# Altium PCB LbElectric.PcbDoc (part 2 of 2)
Units mil, origin at the board's own origin, x right, y up, seen from the top; angles counter-clockwise.
Board outline 7067.96 x 2323.86 mil, 2 copper layers (Top Layer, Bottom Layer), stack 12.8 mil thick; 133 components, 113 nets, 507 pads, 49 vias.
Unrouted connection lines stored in the file: 3.
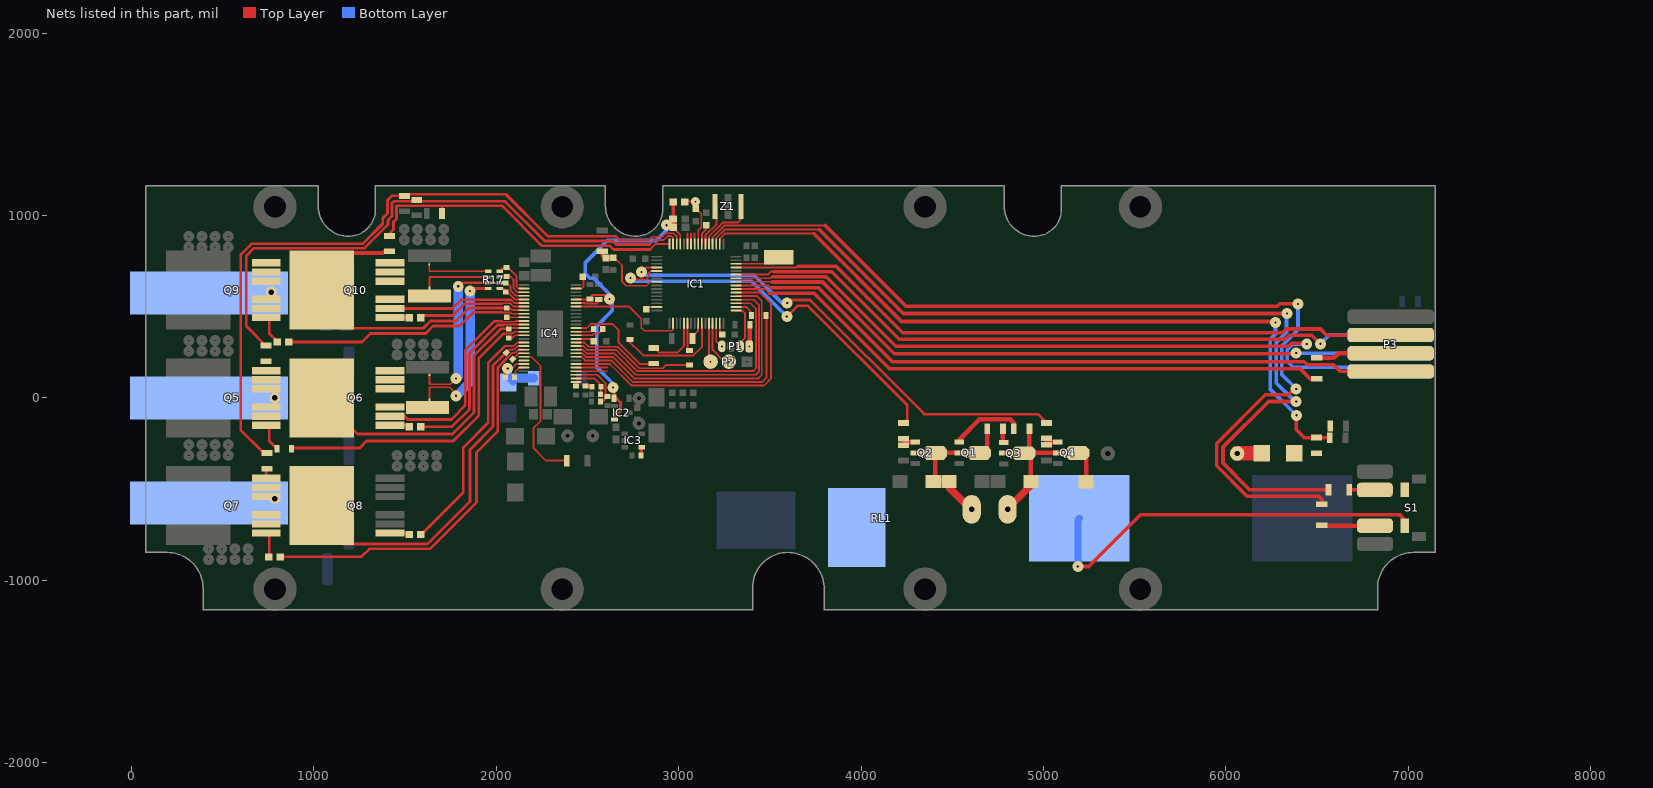
[diagram p2: the nets of this part, all layers, seen from the top]

## Via types
v1: diameter 60, hole 11.81, Top Layer to Bottom Layer, 47 vias
v2: diameter 60, hole 28, Top Layer to Bottom Layer, 2 vias

## Nets (pads, with @x,y where several pads share a name; then routed paths per layer and width w, separated by ;. In a path a pad name is that pad's centre, name@x,y a point inside that pad or via, vN(x,y) a via of type N, cw(c..) or ccw(c..) an arc to the next point about the centre after c; other vN are vias at no path point) (continued)
_REF: C1.1 C3.1 C17.1 C27.1 IC1.13 IC2.2 IC4.24 R12.1 | length 2134.4
  Top Layer w8: C27.1@2513.43,540.43 C27.1@2515,542
  Top Layer w10: IC4.24@2437.66,540.43 C27.1@2513.43,540.43 ; C27.1@2514,542 2514,552 2527,565 2594,565 v1@2621,538 ; v1@2947.54,959 C3.1@2969.54,981 ; C1.1@2968.77,934.23 3009.08,893.92 IC1.13@3009.08,844.54 ; C1.1@2970.54,936 2970.54,938.46 C3.1@2970.54,983.54
  Top Layer w15: v1(2640,58) 2649,58 2649,-2 2659,-2 2681,-24 2681,-71 2649,-103 IC2.2@2649,-117
  Top Layer w20: C1.1@2970.5,938.5 R12.1@2970.5,1075 ; C1.1@2970.54,938.46 C1.1@2974,935
  Bottom Layer w20: v1@2639,56 2639,80 2552,167 2552,395 2636,479 2636,528 v1(2621,543) 2621,569 2533,657 2513,657 2489,681 2489,743 2609,863 2877,863 2934,920 v1(2934,947) v1@2937,950
AN_IN: C10.1 IC1.24 R10.2 R11.1 | length 452.8
  Top Layer w10: C10.1@2643,769 2647,769 2690,726 2690,638 2713,615 2824,615 2845.86,636.86 IC1.24@2880.14,636.86
  Top Layer w20: R10.2@2581,803.91 2581,780 2593,768 2594,769 C10.1@2643,769
CE: IC1.61 P3.3 | length 3632.5
  Top Layer w10: IC1.61@3315.18,715.6 3650.6,715.6 3657,722
  Top Layer w20: 3657,722 3863,722 4228,357 6310,357 6331,378 6518,378 6553,343 6765,343 P3.3@6769,347
CS: IC1.59 P3.4 | length 3797.7
  Top Layer w10: IC1.59@3315.18,676.23 3488.23,676.23 3505,693 3523,693
  Top Layer w20: 3522,692 3839,692 4209,322 6325,322 6347,344 6471,344 v1(6518,297)
  Bottom Layer w20: v1(6518,297) 6566.28,345.28 P3.4@6903.07,345.28
DC_CAL: IC4.12 R7.2 | length 687.3
  Top Layer w10: IC4.12@2437.66,304.21 2483.79,304.21 2507,281 2667,281 2785,163 2913,163 2931,181 R7.2@3059,181
DM: IC1.44 P2.3 | length 215.1
  Top Layer w10: IC1.44@3166.56,409.5 3166.56,213.44 P2.3@3180,200
DP: IC1.45 P2.2 | length 270.3
  Top Layer w10: IC1.45@3186.24,409.5 3186.24,263.76 3251,199 P2.2@3275,199 P2.2@3284,199
EN_GATE: IC4.16 R6.2 | length 578.6
  Top Layer w10: IC4.16@2437.66,382.95 2494.95,382.95 2517,405 2639,405 2670,374 2670,305 2788,187 2875,187 R6.2@2874,188
FAULT: IC1.54 IC4.6 | length 1761.8
  Top Layer w10: IC4.6@2437.66,186.1 2623.9,186.1 2742,68 3468,68 3506,106 3506,520 3448.2,577.8 IC1.54@3315.18,577.8
IRQ: IC1.58 P3.8 | length 3961.4
  Top Layer w10: IC1.58@3315.18,656.54 3503.54,656.54 3514,667
  Top Layer w20: 3516,664 3809,664 4190,283 6342,283 6358,299 6439,299 v1(6443,295)
  Bottom Layer w20: v1(6443,295) 6366,295 6336,265 6336,202 6369,169 6781,169 P3.8@6798,152
LED_1: IC1.4 R8.1 | length 5358.1
  Top Layer w10: IC1.4@3186.24,844.54 3186.24,880.24 3251,945 3804,945
  Top Layer w20: 3804,945 4246,503 6282,503 6295,516 v1(6395,516) ; v1(6385,50) 6374,50 6341,17 6216,17 5949,-250 5949,-371 6116,-538 6510,-538 6527.91,-555.91 R8.1@6527.91,-581.91
  Bottom Layer w20: v1(6385,50) 6306,129 6306,285 6395,374 v1(6395,516)
LED_2: IC1.3 R9.1 | length 5164.7
  Top Layer w10: IC1.3@3205.93,844.54 3205.93,876.93 3252,923 3771,923
  Top Layer w20: 3771,923 4231,463 v1(6335,463) ; v1(6385,-19) 6234,-19 5984,-269 5984,-357 6131,-504 R9.1@6561.91,-504
  Bottom Layer w20: v1@6332,470 6332,360 6275,303 6275,84 6378,-19 v1(6385,-19)
MISO: IC1.56 P3.7 | length 3808.6
  Top Layer w10: IC1.56@3315.18,617.17 3491.83,617.17 3504,605
  Top Layer w20: 3504,605 3766,605 4172,199 6430,199 6447,182 6590,182 6625,147 P3.7@6929,147
MOSI: IC1.57 P3.6 | length 3743.4
  Top Layer w10: IC1.57@3315.18,636.86 3513.14,636.86 3514,636
  Top Layer w20: 3514,636 3789,636 4182,243 6384,243 6384,245 v1(6385,246)
  Bottom Layer w20: v1(6385,246) P3.6@6893,246
NetC4_1: C4.1 IC1.47 | length 68.1
  Top Layer w10: IC1.47@3225.61,409.5 3225.61,367.39 C4.1@3244,349
NetC5_1: C5.1 IC1.31 | length 59.4
  Top Layer w10: C5.1@2827,484 2842.06,499.06 IC1.31@2880.14,499.06
NetC13_2: C13.2@6570,-218 IC1.2 R26.2 R27.1 | length 4144.9
  Top Layer w10: IC1.2@3225.61,844.54 3225.61,873.61 3253,901 3740,901 ; v1@6267,419 v1(6272,414)
  Top Layer w20: 3740,901 4222,419 v1@6267,419 ; v1(6386,-95) 6386,-173 6432,-219 6560,-219 C13.2@6563,-216
  Bottom Layer w20: v1(6272,414) 6272,351 6242,321 6242,49 v1(6386,-95)
NetC18_1: C18.1 IC3.4 | length 44
  Top Layer w18: C18.1@2795,-315 IC3.4@2795,-271
NetC22_2: C22.2 IC4.2 R13.2 | length 200
  Top Layer w10: IC4.2@2437.66,107.36 2537.64,107.36 2573,72 C22.2@2573,22
NetC23_2: C23.2 R13.1 | length 34
  Top Layer w19.68: C23.2@2490,66 2490,65 R13.1@2523,65
NetC24_1: C24.1 IC4.14 | length 161.6
  Top Layer w10: IC4.14@2437.66,343.58 2525.58,343.58 2534,352 2559,352 C24.1@2585,378
NetC24_2: C24.2 IC4.15 | length 98.4
  Top Layer w10: IC4.15@2437.66,363.27 2515.27,363.27 C24.2@2530,378
NetC25_2: C25.2 IC4.13 | length 106.3
  Top Layer w10: IC4.13@2437.66,323.9 2520.1,323.9 C25.2@2537,307
NetC26_1: C26.1 IC4.23 | length 146.2
  Top Layer w10: IC4.23@2437.66,520.75 2485.25,520.75 2488,518 2554,518 2563,527 C26.1@2563,543
NetC28_1: C28.1 IC4.27 | length 98.1
  Top Layer w10: IC4.27@2437.66,599.49 2467.49,599.49 2479,611 C28.1@2479,663
NetC29_1: C29.1 D5.2 IC4.50 IC4.51 L1.1 | length 352.9
  Top Layer w10: v1@2082.5,158.5 2110.1,186.1 IC4.51@2152.23,186.1
  Top Layer w20: C29.1@2050,117 2050,147 v1@2072,169
  Bottom Layer w40: v1@2067,169 2067,114 2092,89 D5.2@2112,109
  Bottom Layer w50: D5.2@2112,109 L1.1@2204,109
  other v1: 2063,161
NetC29_2: C29.2 IC4.52 | length 84.1
  Top Layer w10: C29.2@2104,118 2104,145 2125.42,166.42 IC4.52@2152.23,166.42
NetC33_2: C33.2 IC4.38 | length 82.6
  Top Layer w10: C33.2@2070,443 2070.99,442.01 IC4.38@2152.23,442.01
NetC34_2: C34.2 IC4.48 | length 82
  Top Layer w10: C34.2@2086,207 2124.16,245.16 IC4.48@2152.23,245.16
NetC35_2: C35.2 IC4.43 | length 81.3
  Top Layer w10: C35.2@2077,329 2089,329 2103.58,343.58 IC4.43@2152.23,343.58
NetC37_1: C37.1 IC4.32 R17.5 | length 176.2
  Top Layer w10: R17.5@2019,630 2061,630 2079,612 2079,588 2106.88,560.12 IC4.32@2152.23,560.12
NetC37_2: C37.2 IC4.33 R17.7 | length 152.7
  Top Layer w10: R17.7@2018.5,600.26 2038.74,600.26 C37.2@2058,581 ; C37.2@2063,579 2064,579 2102.57,540.43 IC4.33@2152.23,540.43
NetC38_1: C38.1 IC4.30 R17.1 | length 215
  Top Layer w10: R17.1@2018,695 2033,710 C38.1@2065,710 ; C38.1@2069,710 2112,667 2112,611 2123.51,599.49 IC4.30@2152.23,599.49
NetC38_2: C38.2 IC4.31 R17.3 | length 198.5
  Top Layer w10: R17.3@2024,664 C38.2@2063,664 ; C38.2@2057,667 2077,667 2095,649 2095,601 2116.2,579.8 IC4.31@2152.23,579.8
NetD1_1: D1.1 R8.2 | length 267
  Top Layer w25: R8.2@6550,-700.22 D1.1@6817,-700.22
NetD2_1: D2.1 R9.2 | length 162.2
  Top Layer w20: R9.2@6676.09,-504 D2.1@6816,-504 6834,-504 D2.1@6837,-507
NetD6_1: D6.1 D7.2 Q1.2 Q2.2 R22.2 RL1.3 | length 910.1
  Top Layer w20: Q2.2@4306.38,-301.27 Q2.2@4412.27,-301.27
  Top Layer w25: D7.2@4404,-455 4406.77,-452.23 Q2.2@4406.77,-301.27 ; Q2.2@4439,-310 4447.73,-301.27 Q1.2@4547.28,-301.27 Q1.2@4639.27,-301.27 ; Q1.2@4653,-302 4692,-263 R22.2@4692,-165
  Top Layer w40: D7.2@4395.55,-458 4475,-458 D6.1@4479,-462 ; D6.1@4481.45,-458 4481.45,-489.45 4604,-612 4605,-611 RL1.3@4606,-611
NetD8_1: D8.1 D9.2 Q3.2 Q4.2 R20.1 RL1.4 | length 1018.8
  Top Layer w20: Q3.2@4791.28,-302.27 Q3.2@4879.27,-302.27
  Top Layer w25: Q3.2@4908,-297 Q3.2@4912.27,-301.27 ; Q3.2@4922,-288 R20.1@4922,-169 ; D8.1@4930.55,-458 4930.55,-319.55 Q3.2@4912.27,-301.27 ; Q4.2@5180.27,-301.27 Q4.2@5086.28,-301.27 Q3.2@4912.27,-301.27 ; Q4.2@5201,-298 5233.45,-330.45 D9.2@5233.45,-459
  Top Layer w40: RL1.4@4805,-605 4930.55,-479.45 D8.1@4930.55,-458
NetD10_1: D10.1 R27.2 S1.1
NetD10_2: D10.2 R25.2 | length 136.8
  Top Layer w80: R25.2@6061,-304 6062,-303 D10.2@6197.42,-303
NetF1_1: F1.1 RL1.2 S1.2 | length 2220.2
  Top Layer w20: v1(5188,-924) 5248,-924 5531,-641 6954,-641 6980,-667 S1.2@6980,-699
  Bottom Layer w40: v1(5188,-924) 5189,-923 5189,-667.3 F1.1@5196.85,-659.45
NetIC1_5: IC1.5 Z1.1 | length 339.8
  Top Layer w10: IC1.5@3166.56,844.54 3166.56,886.56 3241,961 3323,961 3341,979 Z1.1@3341,1064
NetIC1_6: IC1.6 Z1.3 | length 244.1
  Top Layer w10: IC1.6@3146.87,844.54 3146.87,891.87 3208,953 3208,1052 Z1.3@3200,1060
NetIC1_14: IC1.14 R33.1 R34.1 | length 3905.3
  Top Layer w10: 2836,865 2855,884 2909,884 2928,903 2972,903 2989.39,885.61 IC1.14@2989.39,844.54
  Top Layer w15: R33.1@739,-297 720.23,-297 600.39,-177.17 600.39,787.4 657.99,845 1268,845 1377.95,954.95 1377.95,984.94 ; 1381,988 1377.95,984.95 ; R34.1@1498,1109 1429,1109 1404,1084 1404,1010.98 1377.95,984.94 ; R34.1@1501,1116 2054,1116 2055,1115 2055,1114 2282,887 2654,887 2676,865 2836,865
NetIC1_15: IC1.15 R31.1 R32.1 | length 3218.9
  Top Layer w10: 2841,841 2866,866 2918,866 2939,887 2960,887 2970,877 IC1.15@2970,846
  Top Layer w15: R31.1@741,286 737.62,286 629.92,393.7 629.92,777.56 673.36,821 1278,821 1407.48,950.48 1407.48,974.48 1413,980 ; 1407.48,975.09 1429.19,996.81 1429.19,1068.19 1439,1078 2047,1078 ; 2048,1078 2266,860 2639,860 2658,841 2841,841
NetIC1_16: IC1.16 R35.1 R36.1 | length 1846.1
  Top Layer w10: 2845,815 2874.54,844.54 IC1.16@2950.02,844.54
  Top Layer w15: R35.1@1397.64,885 1437.01,924.37 1437.01,965.01 1440,968 ; 1437.01,965.25 1453.88,982.12 1453.88,1054 1704,1054 ; R36.1@1704,1011 1704,1054 ; 2844,814 2643,814 2623,834 2251,834 2031,1054 1704,1054
NetIC1_34: IC1.34 IC4.22 | length 657.1
  Top Layer w10: IC4.22@2437.66,501.06 2728.94,501.06 2795,435 2795,386 2813,368 2963,368 2970,375 IC1.34@2970,413
NetIC1_37: IC1.37 R6.1 | length 318.5
  Top Layer w10: R6.1@2862,279 2891,250 2995,250 3028.76,283.76 IC1.37@3028.76,409.5
NetIC1_38: IC1.38 R7.1 | length 152.9
  Top Layer w10: IC1.38@3048.45,409.5 3048.45,271.55 R7.1@3059,261
NetIC1_41: IC1.41 R2.2 | length 81.4
  Top Layer w10: R2.2@3077,339 3107,369 IC1.41@3107,408
NetIC1_42: IC1.42 R3.2 | length 593.7
  Top Layer w10: R3.2@2719,320 2806,233 3081,233 3127.19,279.19 IC1.42@3127.19,409.5
NetIC1_50: IC1.50 R4.2 | length 113.4
  Top Layer w10: IC1.50@3315.18,499.06 3369.94,499.06 3398,471 R4.2@3398,452
NetIC1_52: IC1.52 IC4.10 | length 1569.1
  Top Layer w10: IC4.10@2437.66,264.84 2474.16,264.84 2495,244 2648,244 2765,127 3423,127 3440,144 3440,510 3411.57,538.43 IC1.52@3315.18,538.43
NetIC1_53: IC1.53 IC4.9 | length 1641.7
  Top Layer w10: IC4.9@2437.66,245.16 2470.84,245.16 2491,225 2638,225 2756,107 3437,107 3456,126 3456,533 3430.88,558.12 IC1.53@3315.18,558.12
NetIC1_55: IC1.55 R5.1 | length 3391.6
  Top Layer w10: IC1.55@3315.18,597.49 3474.51,597.49 3498,574
  Top Layer w20: 3498,574 3742,574 4155,161 6406,161 6464,103 R5.1@6502,103
NetIC1_62: IC1.62 WS2812.1 | length 239.9
  Top Layer w10: IC1.62@3315.18,735.28 3517.28,735.28 WS2812.1@3544,762
NetIC4_1: IC4.1 R15.1 | length 28.3
  Top Layer w8: R15.1@2436,61 R15.1@2437.66,61
  Top Layer w10: R15.1@2437.66,61 IC4.1@2437.66,87.68
NetIC4_3: IC4.3 R14.1 R16.2 | length 297
  Top Layer w10: IC4.3@2437.66,127.05 2552.95,127.05 2599,81 R16.2@2599,-3
  Top Layer w15: R14.1@2573,-19 2583,-19 R16.2@2599,-3
NetIC4_4: IC4.4 | length 171.3
  Top Layer w10: IC4.4@2437.66,146.73 2609,146.73
NetIC4_5: IC4.5 | length 171.3
  Top Layer w10: IC4.5@2437.66,166.42 2609,166.42
NetIC4_49: IC4.49 R18.2 | length 787
  Top Layer w10: IC4.49@2152.23,225.47 2193.53,225.47 2243,176 2243,-127 2204,-166 2204,-274 2273,-343 R18.2@2385,-343
NETLABEL12: IC1.9 | length 58.3
  Top Layer w10: IC1.9@3087.82,844.54 3087.82,902.82
NETLABEL13: IC1.10 | length 58.6
  Top Layer w10: IC1.10@3068.13,844.54 3068.13,903.13
NETLABEL14: IC1.11 | length 57.9
  Top Layer w10: IC1.11@3048.45,844.54 3048.45,902.45
NetNT2_1: NT2.1 R17.8 | length 944.7
  Top Layer w10: 1634,-2 1634,59 1745,59 1780,24 v1(1780,12)
  Top Layer w15: v1@1856,587 v1(1857,587) 1870.26,600.26 R17.8@1955.5,600.26
  Bottom Layer w50: v1@1781,16 1786,16 1858,88 1858,586 v1(1857,587)
NetNT3_1: NT3.1 R17.6 | length 887.2
  Top Layer w10: NT3.1@1633.86,122 1633.86,75 1749,75 v1(1780,106)
  Top Layer w15: v1@1792,609 v1(1792,612) 1811.76,631.76 R17.6@1955.5,631.76
  Bottom Layer w50: v1@1782,106 1792,116 1792,581 1793,582 v1@1793,608
NetNT4_1: NT4.1 R17.4 | length 374.8
  Top Layer w10: 1634,610 1634,663.25 R17.4@1955.5,663.25
NetNT5_1: NT5.1 R17.2 | length 355.8
  Top Layer w10: NT5.1@1633,728 1633,694.75 R17.2@1955.5,694.75
NetP1_1: P1.1 R1.1 | length 126.5
  Top Layer w7.87: R1.1@3389,413 R1.1@3391,411
  Top Layer w25: P1.1@3387,283 3391,287 R1.1@3391,405
NetQ1_3: Q1.3 R20.2 | length 400.6
  Top Layer w25: Q1.3@4540,-243 4540,-226 4649,-117 4819,-117 4837,-135 R20.2@4837,-169
NetQ2_3: Q2.3 R19.2 R21.2 | length 60.4
  Top Layer w25: 4238,-240 4240.21,-242.21 Q2.3@4297.52,-242.21
NetQ3_3: Q3.3 R22.1 | length 82.3
  Top Layer w25: R22.1@4777,-165 4777,-236 Q3.3@4785,-244
NetQ4_3: Q4.3 R23.2 R24.2 | length 98
  Top Layer w25: R24.2@5014,-224 R24.2@5018,-228 ; R23.2@5018,-255 R24.2@5018,-228 ; Q4.3@5077.42,-242.21 5032.21,-242.21 R24.2@5018,-228
NetQ5_1: Q5.1 R28.2 | length 127.2
  Top Layer w15: Q5.1@755.91,-165.35 755.91,-236.22 792.69,-273 R28.2@797,-273
NetQ6_1: Q6.1 R29.2 | length 101.5
  Top Layer w15: Q6.1@1417.32,-150 1508.27,-150 R29.2@1515.75,-157.48
NetQ7_1: Q7.1 R38.2 | length 114.1
  Top Layer w15: R38.2@755.91,-870 Q7.1@755.91,-755.9
NetQ8_1: Q8.1 R37.2 | length 90.9
  Top Layer w15: Q8.1@1417.32,-740.55 R37.2@1508.27,-740.55
NetQ9_1: Q9.1 R40.2 | length 150.1
  Top Layer w15: Q9.1@755.91,440.94 755.91,354.33 800.24,310 R40.2@801,310
NetQ10_1: Q10.1 R39.2 | length 106.1
  Top Layer w20: Q10.1@1417.32,440.55 R39.2@1523.45,440.55
PHASE_1: C35.1 IC4.41 J3.1 pad.26@787.4,0 Q5.2 Q5.3 Q5.4 Q5.5 Q5.6 Q6.7 R31.2 | length 1611.8
  Top Layer w10: C35.1@2074,378 2078.95,382.95 IC4.41@2152.23,382.95
  Top Layer w15: Q6.7@1043.31,0 1240.16,-196.85 1761.15,-196.85 1878,-80 1878,232 2025,379 C35.1@2072,379
PHASE_2: C34.1 IC4.46 J4.1 pad.26@787.4,-551.18 Q7.2 Q7.3 Q7.4 Q7.5 Q7.6 Q8.7 R33.2 | length 2120.5
  Top Layer w10: C34.1@2052,243 2075,266 2099,266 2117.53,284.53 IC4.46@2152.23,284.53
  Top Layer w15: Q7.6@740.16,-440.55 R33.2@740.16,-388 ; Q8.7@1043.31,-590.55 1043.31,-685.31 1158,-800 1624,-800 1856,-568 1856,-284 1983,-157 1983,177 C34.1@2055,249
PHASE_3: C33.1 IC4.36 J5.1 pad.26@767.72,580.71 Q9.2 Q9.3 Q9.4 Q9.5 Q9.6 Q10.7 R35.2 | length 1628.4
  Top Layer w10: C33.1@2062,496 2067,491 2077,491 2086.62,481.38 IC4.36@2152.23,481.38
  Top Layer w15: Q10.7@1102.36,590.55 Q10.7@1043.31,590.55 1043.31,472.69 1134,382 1600,382 1640,422 1780,422 1851,493 C33.1@2050,493
  Top Layer w20: Q10.7@1145,751 1189,795 1379,795 R35.2@1388,804
RELAY_OFF: IC1.20 R24.1 | length 2667.1
  Top Layer w10: v1@2799,693 2821.6,715.6 IC1.20@2880.14,715.6
  Top Layer w15: v1(3595,520) 3612,537 3721,537 4347,-89 4969,-89 R24.1@5016,-136
  Bottom Layer w20: v1(2796,691) 2797,690 2802,690 2819,673 3414,673 3567,520 v1(3595,520)
RELAY_ON: IC1.21 R19.1 | length 2148.5
  Top Layer w10: v1@2732,652 2735,649 2822,649 2837,664 2837,685 2847.91,695.91 IC1.21@2880.14,695.91
  Top Layer w15: v1(3593,446) 3652,505 3710,505 4253,-38 4253,-118 R19.1@4233,-138
  Bottom Layer w20: v1@2729,653 2742,640 3399,640 v1(3593,446)
  other v1: 2736,658
RESET: C2.1 IC1.7 | length 116.3
  Top Layer w10: IC1.7@3127.19,844.54 3127.19,900.19 3151,924 C2.1@3151,951
S\P\I\_\C\S\: IC4.8 R4.1 | length 1453.1
  Top Layer w10: IC4.8@2437.66,225.47 2467.53,225.47 2487,206 2631,206 2750,87 3456,87 3481,112 R4.1@3481,454
SCK: P3.5 R5.2 | length 459.7
  Top Layer w25: R5.2@6498,220.09 6592.09,220.09 6618,246 P3.5@6947,246
SPI_SCK: IC1.51 IC4.11 | length 1496.4
  Top Layer w10: IC4.11@2437.66,284.53 2478.47,284.53 2500,263 2657,263 2773,147 3408,147 3424,163 3424,489 3394,519 IC1.51@3316,519
SWCLK: IC1.49 P1.2 | length 248
  Top Layer w10: IC1.49@3315.18,479.38 3349.62,479.38 3364,465 3364,329 3337,302 P1.2@3337,283
SWDIO: IC1.46 P1.4 | length 138.5
  Top Layer w10: IC1.46@3205.93,409.5 3205.93,312.07 P1.4@3235,283
TEMP_MOTOR: C16.1 IC1.8 J2.1 R12.2 | length 311.4
  Top Layer w10: R12.2@3034,1075 3036,1077 3092,1077 J2.1@3092,1076 3092,1042 3124,1010 3124,936 3107.5,919.5 IC1.8@3107.5,844.54
UH_P: IC4.42 R28.1 | length 1722.9
  Top Layer w10: 2043,353 2089,353 2099.27,363.27 IC4.42@2152.23,363.27
  Top Layer w15: R28.1@877,-274 1252,-274 1289.78,-236.22 1764.78,-236.22 1905,-96 1905,219 2037,351 2043,351
UL_N: IC4.39 NT2.2 Q6.2 Q6.3 Q6.4 Q6.5 Q6.6 R30.1 | length 1154.4
  Top Layer w10: 2020,418 2103,418 2107.32,422.32 IC4.39@2152.23,422.32
  Top Layer w15: Q6.2@1417.32,-100 1497.64,-100 1515.75,-118.11 1753.89,-118.11 1830,-42 1830,260 1991,421 2030,421
UL_P: IC4.40 R29.1 | length 977
  Top Layer w10: 2040,402.64 IC4.40@2152.23,402.64
  Top Layer w15: R29.1@1586.61,-157.48 1758.52,-157.48 1853,-63 1853,245 2008,400 2040,400
VH_P: IC4.47 R38.1 | length 2170.7
  Top Layer w10: 2055,214 2089,248 2104,248 2120.84,264.84 IC4.47@2152.23,264.84
  Top Layer w15: R38.1@816.5,-871 R38.1@821,-871 ; R38.1@821,-870 1262,-870 1305.23,-826.77 1637.23,-826.77 1892,-572 1892,-298 2009,-181 2009,168 2055,214
VL_P: IC4.45 R37.1 | length 1405.8
  Top Layer w10: 1998,232 2050,284 2095,284 2115.21,304.21 IC4.45@2152.23,304.21
  Top Layer w15: R37.1@1586.61,-748.03 1588.97,-748.03 1820,-517 1820,-272 1956,-136 1956,192 2046,282
WH_P: IC4.37 R40.1 | length 1358.9
  Top Layer w10: 2030,468 2078,468 2084.31,461.69 IC4.37@2152.23,461.69
  Top Layer w15: R40.1@862.5,307 1264,307 1311,354 ; 1312,354 1614,354 1654,394 1799,394 1875,470 2030,470
WL_N: IC4.34 NT4.2 Q10.2 Q10.3 Q10.4 Q10.5 Q10.6 R41.1 | length 793.2
  Top Layer w10: 2047.24,535 2085,535 2099.25,520.75 IC4.34@2152.23,520.75
  Top Layer w15: Q10.2@1417.32,490.55 1758.55,490.55 1806,538 2080,538
WL_P: IC4.35 R39.1 | length 604.6
  Top Layer w10: 2030,519 2077,519 2094.94,501.06 IC4.35@2152.23,501.06
  Top Layer w15: R39.1@1586.5,440 1598.5,452 1762,452 1826,516 2030,516
pads on no net: IC1.17 IC1.22 IC1.23 IC1.25 IC1.28 IC1.29 IC1.30 IC1.33 IC1.39 IC1.40 IC4.55 IC4.56 S1.3
copper on no net: | length 934.1
  Top Layer w20: 6374.58,-303 6648,-303 6649,-302 ; 6610,-304 6638,-304 6638,-542 6660,-564 6949,-564 6979.31,-533.68 6979.31,-503.37
  other v1: 3462,1067

## Polygon pours and split planes (outlines as drawn)
_CTRL_GND on Bottom Layer "BTM_GND" (solid, remove dead copper, pour order 19): 1338.58,1259.84 1338.58,984.25 1830.71,984.25 1850.39,984.25 1948.82,885.83 2027.56,807.09 2027.56,688.98 2027.56,275.59 2086.61,216.54 2106.3,196.85 2342.52,196.85 2342.52,-295.28 2637.8,-295.28 2657.48,-314.96 2657.48,-1259.84 2716.54,-1318.9 2736.22,-1299.21 7362.2,-1299.21 7362.2,1220.47 7165.35,1417.32 7066.93,1515.75 2618.11,1515.75 1594.49,1515.75
_IN on Bottom Layer "BTM_FUSE_IN" (solid, remove dead copper, pour order 18): 5706,1210.63 6236,1210.63 6236,-103.92 6562.04,-429.96 6761.81,-429.96 6761.81,-895.67 6181.1,-895.67 6131.89,-895.67 5706,-469.78
NetF1_1 on Bottom Layer "BTM_FUSE_OUT" (solid, remove dead copper, pour order 17): 3730.32,-452.76 5433.07,-452.76 5511.81,-531.5 5511.81,-826.77 5442.91,-895.67 3730.32,-895.67
_CTRL_GND on Bottom Layer "Bottom GND" (solid, remove dead copper, pour order 8): 1043.31,964.57 1043.31,-885.83 1397.64,-885.83 3129.92,-885.83 3129.92,-472.44 3129.92,-413.39 5662,-413.39 5662,1289.37 5148,1289.37 5148,1269.53 3819.41,-59.06 2923.23,-59.06 2647.64,-334.65 2204.72,-334.65 2007.87,-137.8 2007.87,787.4 1830.71,964.57
+48V on Bottom Layer "Bottom 48" (solid, pour order 6): -255.91,1338.58 -314.96,1338.58 -314.96,-1122.05 -314.96,-1200.79 3699.41,-1200.79 3699.41,-462 3017.28,-462 2777.93,-701.35 1338.58,-701.35 1193.47,-846.46 1112.2,-846.46 1112.2,1338.58
PHASE_3 on Bottom Layer "TOP PH 3" (solid, remove dead copper, pour order 5): 659.45,730 659.45,421 918,421 918,730
PHASE_1 on Bottom Layer "TOP PH 3" (solid, remove dead copper, pour order 3): 658.45,157 658.45,-152 917,-152 917,157
PHASE_2 on Bottom Layer "TOP PH 3" (solid, remove dead copper, pour order 4): 657.45,-418 657.45,-727 916,-727 916,-418
_IN on Top Layer "TOP_+" (solid, remove dead copper, pour order 2): 5712,1192 5712,715 6242,715 6242,1195 5715,1195
NetC29_1 on Top Layer "TOP_SW" (solid, remove dead copper, pour order 20): 2183,212 2183,179 2124,179 2086,141 2051,141 2051,173 2049,175 2087,213 2183,213
_CTRL_GND on Top Layer "TOP GND LOGIC" (solid, remove dead copper, pour order 16): 1345,1290 1345,984 1613,984 1879,984 2056,807 2186,677 2186,225 2186,-1259 2280,-1353 2287,-1346 4047,-1346 7169,-1346 7331,-1184 7408,-1107 7408,848 7408,956 7081,1283 7074,1290 1341,1290
_CTRL_GND on Top Layer "TOP GND FETS" (solid, remove dead copper, pour order 15): 45,1235 45,-1202 1943,-1202 2021,-1202 2021,798 1863,956 1237,956 1141,1052 962,1231 44,1231
UL_N on Top Layer "TOP GND PH3" (solid, remove dead copper, pour order 14): 1338.58,177.17 1338.58,-137.8 1751.97,-137.8 1751.97,29.53 1515.75,29.53 1515.75,177.17 1338.58,177.17
WL_N on Top Layer "TOP GND PH3" (solid, remove dead copper, pour order 13): 1338.58,777.56 1338.58,462.6 1751.97,462.6 1751.97,629.92 1515.75,629.92 1515.75,777.56 1338.58,777.56
PHASE_2 on Top Layer "TOP PH 1" (solid, remove dead copper, pour order 12): 659.45,-413.39 659.45,-767.72 659.45,-777.56 659.45,-826.77 659.45,-827.29 708.66,-826.77 1220.47,-826.77 1269.68,-826.77 1318.9,-826.77 1318.9,-777.56 1318.9,-413.39 1318.9,-374.02 1279.53,-374.02 698.82,-374.02 659.45,-374.02
PHASE_1 on Top Layer "TOP PH 1" (solid, remove dead copper, pour order 11): 659.45,177.17 659.45,-177.17 659.45,-187.01 659.45,-236.22 659.45,-236.74 708.66,-236.22 1220.47,-236.22 1269.68,-236.22 1318.9,-236.22 1318.9,-187.01 1318.9,177.17 1318.9,216.54 1279.53,216.54 698.82,216.54 659.45,216.54
PHASE_3 on Top Layer "TOP PH 3" (solid, remove dead copper, pour order 10): 659.45,767.72 659.45,403.54 659.45,354.33 708.66,354.33 1318.9,354.33 1318.9,767.72 1318.9,807.09 1279.53,807.09 708.66,807.09 698.82,807.09 659.45,807.09
_DRV_PWR on Top Layer "TOP DRV 48V" (solid, remove dead copper, pour order 9): 2116.14,157.48 2037.4,78.74 2037.4,-442.91 2165.35,-442.91 2165.35,-403.54 2165.35,-265.75 2165.35,-167.32 2224.41,-108.27 2224.41,147.64 2214.57,157.48
+48V on Top Layer "Bottom 48" (solid, remove dead copper, pour order 7): 127.95,1112.2 127.95,-796.73 295.28,-796.73 452.24,-953.69 452.24,-1102.36 649.61,-1101.85 649.61,-1426.46 2178,-1426.46 2178,-456 2029,-456 2029,-1229.09 649.61,-1229.09 649.61,-1102.36 649.61,1112.2

## Keep-outs
Keep-Out Layer:
  lines w1: 78.74,-846.46 78.74,1161.42 ; 78.74,-846.46 196.85,-846.46 ; 78.74,-846.46 196.85,-846.46 ; 78.74,-846.46 78.74,1161.42 ; 78.74,1161.42 1023.62,1161.42 ; 78.74,1161.42 1023.62,1161.42 ; 196.85,-846.46 cw(c196.85,-1043.31) 393.7,-1043.31 ; 196.85,-846.46 cw(c196.85,-1043.31) 393.7,-1043.31 ; 393.7,-1161.42 2244.09,-1161.42 ; 393.7,-1161.42 393.7,-1043.31 ; 393.7,-1161.42 393.7,-1043.31 ; 393.7,-1161.42 2244.09,-1161.42 ; 1023.62,1052.44 ccw(c1190.24,1052.44) 1190.24,885.83 ; 1023.62,1052.44 ccw(c1190.24,1052.44) 1190.24,885.83 ; 1023.62,1052.44 1023.62,1161.42 ; 1023.62,1052.44 1023.62,1161.42 ; 1190.24,885.83 ccw(c1190.24,1034.17) 1338.58,1034.17 cw(c1190.24,1034.17) 1190.24,885.83 ; 1338.58,1024.31 1338.58,1015.17 1338.58,1024.31 ; 1338.58,1024.31 1338.58,1142.42 1338.58,1024.31 ; 2244.09,-1161.42 3405.51,-1161.42 ; 2244.09,-1161.42 3405.51,-1161.42 ; 2598.43,1052.44 ccw(c2765.04,1052.44) 2765.04,885.83 ; 2598.43,1052.44 ccw(c2765.04,1052.44) 2765.04,885.83 ; 2598.43,1052.44 2598.43,1161.42 ; 2598.43,1052.44 2598.43,1161.42 ; 2598.43,1161.42 1338.58,1161.42 2598.43,1161.42 ; 2765.04,885.83 ccw(c2765.04,1034.17) 2913.39,1034.17 ; 2765.04,885.83 ccw(c2765.04,1034.17) 2913.39,1034.17 ; 2913.39,1034.17 2913.39,1043.31 ; 2913.39,1034.17 2913.39,1043.31 ; 2913.39,1043.31 2913.39,1161.42 ; 2913.39,1043.31 2913.39,1161.42 ; 2913.39,1161.42 4783.46,1161.42 ; 2913.39,1161.42 4783.46,1161.42 ; 3405.51,-1161.42 3405.51,-1043.31 ; 3405.51,-1161.42 3405.51,-1043.31 ; 3405.51,-1043.31 3405.51,-1038.53 ; 3405.51,-1043.31 3405.51,-1038.53 ; 3405.51,-1038.53 cw(c3597.59,-1038.53) 3597.59,-846.46 ; 3405.51,-1038.53 cw(c3597.59,-1038.53) 3597.59,-846.46 ; 3597.59,-846.46 cw(c3597.59,-1048.08) 3799.21,-1048.08 ; 3597.59,-846.46 cw(c3597.59,-1048.08) 3799.21,-1048.08 ; 3799.21,-1161.42 6830.71,-1161.42 ; 3799.21,-1161.42 3799.21,-1048.08 ; 3799.21,-1161.42 3799.21,-1048.08 ; 3799.21,-1161.42 6830.71,-1161.42 ; 4783.46,1052.44 ccw(c4950.08,1052.44) 4950.08,885.83 ; 4783.46,1052.44 ccw(c4950.08,1052.44) 4950.08,885.83 ; 4783.46,1052.44 4783.46,1161.42 ; 4783.46,1052.44 4783.46,1161.42 ; 4950.08,885.83 ccw(c4950.08,1034.17) 5098.43,1034.17 ; 4950.08,885.83 ccw(c4950.08,1034.17) 5098.43,1034.17 ; 5098.43,1034.17 5098.43,1043.31 ; 5098.43,1034.17 5098.43,1043.31 ; 5098.43,1043.31 5098.43,1161.42 ; 5098.43,1043.31 5098.43,1161.42 ; 5098.43,1161.42 7145.67,1161.42 ; 5098.43,1161.42 7145.67,1161.42 ; 6830.71,-1161.42 6830.71,-1043.31 ; 6830.71,-1161.42 6830.71,-1043.31 ; 6830.71,-1043.31 cw(c7027.56,-1043.31) 7027.56,-846.46 ; 6830.71,-1043.31 cw(c7027.56,-1043.31) 7027.56,-846.46 ; 7027.56,-846.46 7145.67,-846.46 ; 7027.56,-846.46 7145.67,-846.46 ; 7145.67,-846.46 7145.67,1161.42 ; 7145.67,-846.46 7145.67,1161.42

## Other copper
Top Layer:
  pour cut-out: 1453.82,945.93 1380.82,945.93 1380.82,816.93 1453.82,816.93
  pour cut-out: 1330.5,-256 1261.5,-256 1261.5,-368 1330.5,-368
  pour cut-out: 1331,345 1258,345 1258,216 1331,216
  pour cut-out: 6952,-458 6952,-566 7079,-566 7079,-459 6953,-459
  pour cut-out: 6952,-636 6952,-744 7079,-744 7079,-637 6953,-637
  pour cut-out: 4512,-229 4690,-229 4690,-375 4512,-375
  pour cut-out: 4273,-229 4451,-229 4451,-375 4273,-375
  pour cut-out: 4755,-229 4933,-229 4933,-375 4755,-375
  pour cut-out: 5055,-228 5233,-228 5233,-374 5055,-374
Bottom Layer:
  pour cut-out: 2195,240 2471,240 2471,-17 2196,-17 2196,239
Multi-Layer:
  pour cut-out: 196.85,-846.97 cw(c196.85,-1043.3) 393.19,-1043.31 393.19,-1161.42 ccw(c393.7,-1161.42) 393.7,-1161.93 3405.51,-1161.93 ccw(c3405.51,-1161.42) 3406.03,-1161.42 3406.03,-1038.53 cw(c3597.59,-1038.53) 3597.59,-846.97 cw(c3597.59,-1048.08) 3798.7,-1048.08 3798.7,-1161.42 ccw(c3799.21,-1161.42) 3799.21,-1161.93 6830.71,-1161.93 ccw(c6830.71,-1161.42) 6831.22,-1161.42 6831.22,-1043.31 cw(c7027.56,-1043.31) 7027.56,-846.97 7145.67,-846.97 ccw(c7145.67,-846.46) 7146.18,-846.46 7146.18,1161.42 ccw(c7145.67,1161.42) 7145.67,1161.93 5098.43,1161.93 ccw(c5098.42,1161.42) 5097.91,1161.42 5097.91,1034.17 cw(c4950.08,1034.17) 4950.08,886.34 cw(c4950.08,1052.44) 4783.98,1052.44 4783.98,1161.42 ccw(c4783.47,1161.42) 4783.46,1161.93 2913.39,1161.93 ccw(c2913.38,1161.42) 2912.87,1161.42 2912.87,1034.17 cw(c2765.05,1034.17) 2765.04,886.34 cw(c2765.04,1052.44) 2598.94,1052.44 2598.94,1161.42 ccw(c2598.43,1161.42) 2598.43,1161.93 1338.58,1161.93 ccw(c1338.58,1161.42) 1338.07,1161.42 1338.07,1034.17 cw(c1190.24,1034.17) 1190.24,886.34 cw(c1190.24,1052.44) 1024.14,1052.44 1024.14,1161.42 ccw(c1023.62,1161.42) 1023.62,1161.93 78.74,1161.42 -905.51,1889.76 9055.12,2125.98 ccw(c182391.98,12828.1) 9370.08,-2125.98 -1535.69,-2460.37 ccw(c-45481.87,6126.57) -905.51,1889.76 ccw(c3057.13,6728.61) -411.99,1524.56 ccw(c3528.12,6335.89) 78.74,1161.42 ccw(c78.48,1160.26) 78.22,1161.42 78.23,-846.46 ccw(c78.74,-846.46) 78.74,-846.97

## Silkscreen, mask and mechanical layers (free items; w line width, h text height)
Top Overlay:
  circle w10: c1181.1,1047.24 r157.48
  circle w10: c2755.91,1047.24 r157.48
  circle w10: c4940.94,1047.24 r157.48
  circle w10: c3602.36,-1047.24 r196.85
  circle w10: c196.85,-1047.24 r196.85
  circle w10: c7027.56,-1047.24 r196.85
  lines w10: -320.6,1157.48 8138.4,1157.48 ; -303.6,-1157.48 8155.4,-1157.48 ; 0,-1834.65 0,1902.76 ; 78.74,-1865.65 78.74,1871.76 ; 7145.67,-1843.65 7145.67,1893.76